# EAGLE board Rear_left_lamp_v1 (EAGLE 7.3.0)
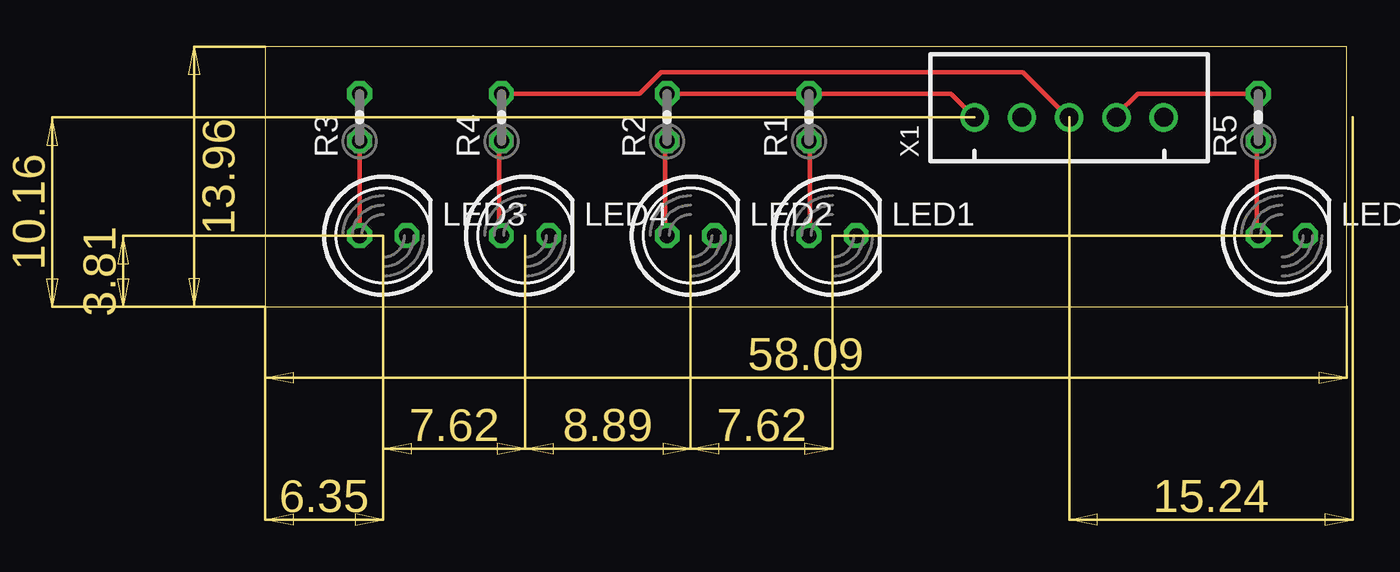
[diagram p0: board, top side]
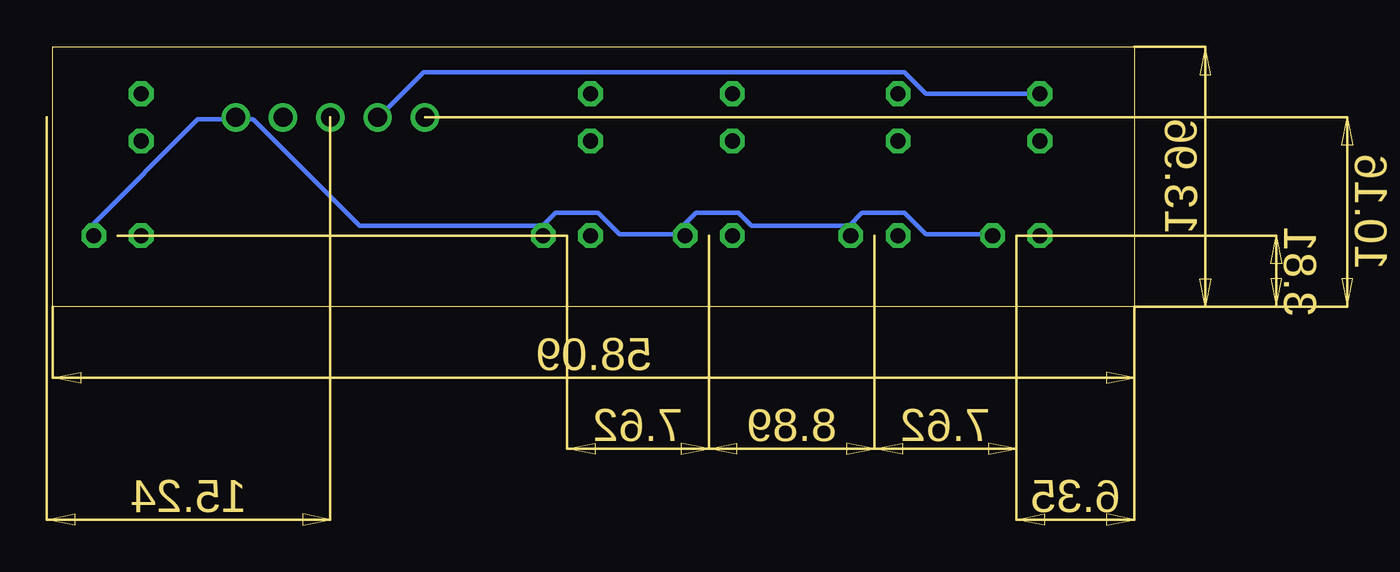
[diagram p1: board, bottom side, seen from below]

Size 58.09 x 13.96 mm. Coordinates in mm from the lower left corner, seen from the top.
Outline: 0,0 58.09,0 58.09,13.96 0,13.96 0,0
Copper layers (1*16): Top 0.035mm / dielectric 1.5mm / Bottom 0.035mm
Design rules "default": minimum track width 10mil, minimum drill 24mil, track to track 8mil, track to pad 8mil, pad to pad 8mil, via to via 8mil, smd to smd 8mil, copper to edge 40mil, drill to drill 8mil, minimum pad ring 10mil, minimum via ring 8mil, stop-mask expansion 4mil, vias tented up to drill 0mil, thermal gap 10mil

## Footprints (pad centres in the part's own frame; a part is rotated, then mirrored left to right if it is on the bottom)
LED5MM = drill 0.813 octagon: A -1.27,0; K 1.27,0
0204V = drill 0.813 octagon: 1 -1.27,0; 2 1.27,0
JST-XH-05-PACKAGE-ROUND-PAD = drill 1.016: 1 -5.08,0; 2 -2.54,0; 3 0,0; 4 2.54,0; 5 5.08,0

## Placement (x,y rotation side)
LED1  1.83 V  [LED5MM]  30.48,3.81 0 top
LED2  1.83 V  [LED5MM]  22.86,3.81 0 top
LED3  1.88 V  [LED5MM]  6.35,3.81 0 top
LED4  1.83 V  [LED5MM]  13.97,3.81 0 top
LED5  2.58 V  [LED5MM]  54.61,3.81 0 top
R1  6K8  [0204V]  29.21,10.16 90 top
R2  6K8  [0204V]  21.59,10.16 90 top
R3  680  [0204V]  5.08,10.16 90 top
R4  1K  [0204V]  12.7,10.16 90 top
R5  4K7  [0204V]  53.34,10.16 90 top
X1  JST-XH-05-PIN-ROUND-PAD  [JST-XH-05-PACKAGE-ROUND-PAD]  43.18,10.16 0 top

## Library data of the parts
LED1 LED2 LED4 = led; COLOR: Red; CURRENT: 1.48 mA
LED3 = led; COLOR: Yellow; CURRENT: 1.42 mA
LED5 = led; COLOR: White; CURRENT: 0.14 mA
R1-R5 = resistor
X1 = Rembrandt Electronics - JST XH Connectors v1-0

## Nets
API_BREAK: R4.2 X1.3
API_START_ENGINE: R1.2 R2.2 X1.1
API_TURN_LEFT: R3.2 X1.2
API_WITHDRAW: R5.2 X1.4
GND: LED1.K LED2.K LED3.K LED4.K LED5.K X1.5
N$1: LED1.A R1.1
N$2: LED2.A R2.1
N$4: LED3.A R3.1
N$8: LED4.A R4.1
N$10: LED5.A R5.1

## Tracks (layer width: path | path; a pad name or v marks a point on that pad's centre or on a via)
API_BREAK
  Top 0.254: R4.2 20.12,11.43 21.26,12.57 40.69,12.57 42.98,10.29 X1.3
API_START_ENGINE
  Top 0.254: R2.2 R1.2 36.83,11.43 X1.1
API_TURN_LEFT
  Bottom 0.254: R3.2 11.2,11.43 12.34,12.57 38.18,12.57 40.46,10.29 X1.2
API_WITHDRAW
  Top 0.254: R5.2 46.86,11.43 45.72,10.29 X1.4
GND
  Bottom 0.254: LED5.K 56.01,3.89 56.01,4.34 50.29,10.06 48.46,10.06 X1.5 48.23,10.06 47.32,10.06 41.6,4.34 31.77,4.34 | 15.32,4.34 14.63,5.03 12.34,5.03 11.2,3.89 7.77,3.89 LED3.K | 15.32,4.34 15.32,3.89 LED4.K 15.32,4.34 | 24.69,3.89 27.66,3.89 28.8,5.03 31.09,5.03 31.77,4.34 | 24.69,3.89 24.23,3.89 LED2.K 24.69,3.89 | 31.77,4.34 31.77,3.89 LED1.K 31.77,4.34 | 15.32,4.34 20.57,4.34 21.26,5.03 23.55,5.03 24.69,3.89
N$1
  Top 0.254: LED1.A 29.26,3.89 29.26,8.69 R1.1
N$2
  Top 0.254: LED2.A 21.49,3.89 21.49,8.69 R2.1
N$4
  Top 0.254: R3.1 LED3.A
N$8
  Top 0.254: LED4.A 12.57,3.89 12.57,8.69 R4.1
N$10
  Top 0.254: LED5.A 53.26,3.89 53.26,8.69 R5.1